# EAGLE board sp0256_dcf77 (EAGLE 7.7.0)
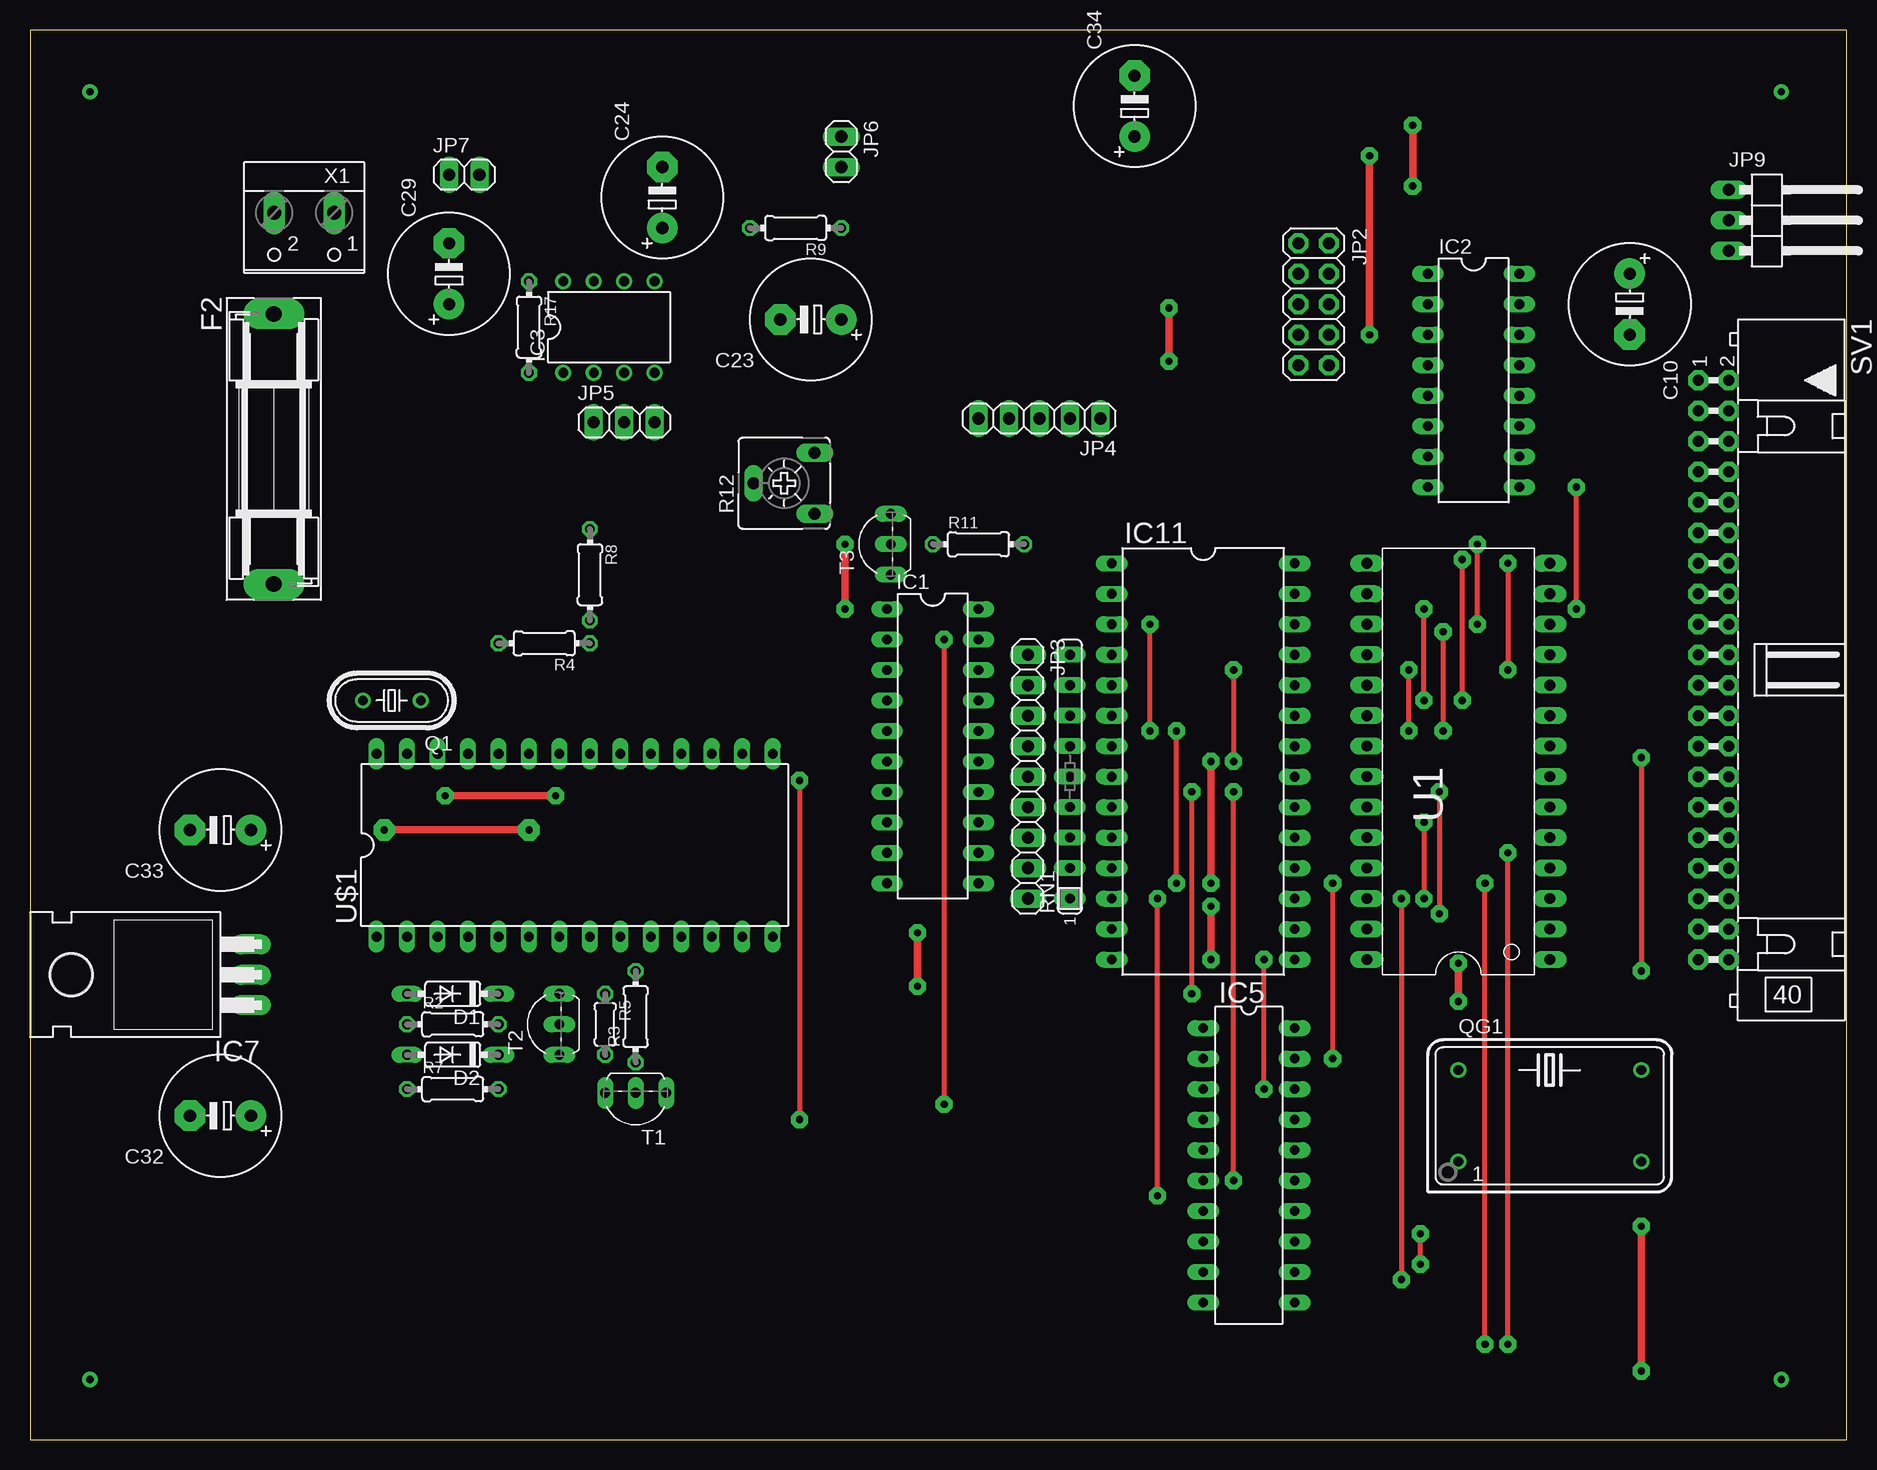
[diagram p0: board, top side]
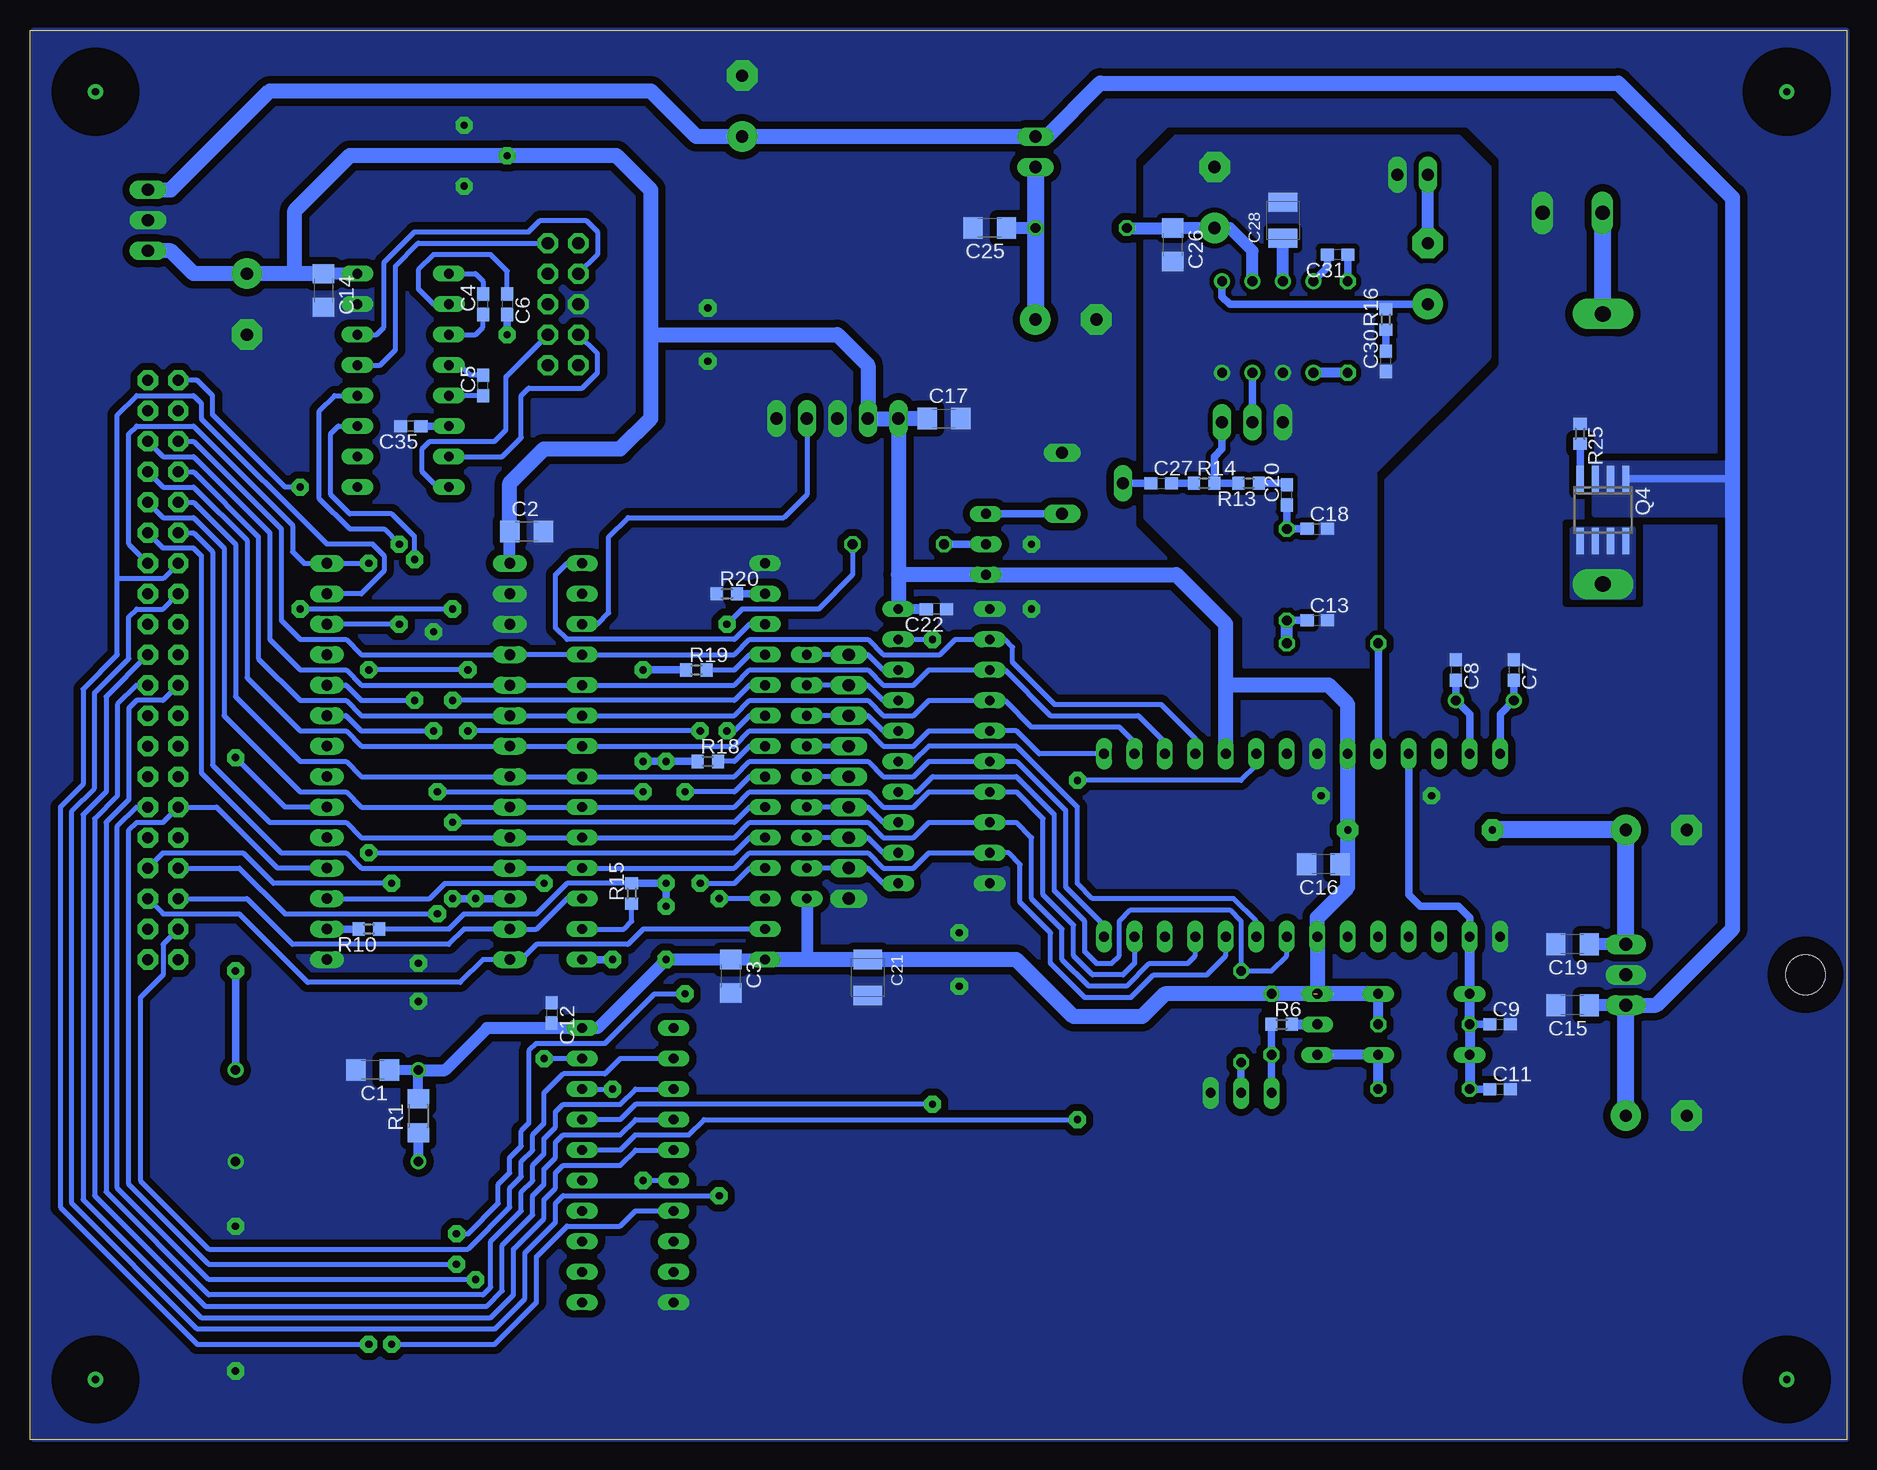
[diagram p1: board, bottom side, seen from below]

Size 151.44 x 117.47 mm. Coordinates in mm from the lower left corner, seen from the top.
Outline: 0,0 151.44,0 151.44,117.47 0,117.47 0,0
Copper layers (1*16): Top 0.035mm / dielectric 1.5mm / Bottom 0.035mm
Design rules "default *": minimum track width 10mil, minimum drill 24mil, track to track 8mil, track to pad 8mil, pad to pad 8mil, via to via 8mil, smd to smd 8mil, copper to edge 0mil, drill to drill 8mil, minimum pad ring 10mil, minimum via ring 8mil, stop-mask expansion 4mil, vias tented up to drill 0mil, thermal gap 10mil
bRestrict: area 2,2 to 8,8; area 2,109.3 to 8,115.4; area 142.9,2 to 149,8; area 142.9,109.3 to 149,115.4; area 116.2,57.8 to 128.9,61

## Footprints (pad centres in the part's own frame; a part is rotated, then mirrored left to right if it is on the bottom)
C1206 = smd 1.6 x 1.8: 1 -1.4,0; 2 1.4,0
C0603 = smd 1.1 x 1: 1 -0.85,0; 2 0.85,0
E5-10,5 = drill 1.016 pad 2.54: + -2.54,0 | drill 1.016 pad 2.54 octagon: - 2.54,0
SMC_B = smd 1.6 x 2.4: + -1.5,0; - 1.5,0
DO35-7 = drill 0.813 long: A 3.81,0; C -3.81,0
SH22,5 = drill 1.321 pad 2.54 long: 1 -11.252,0; 2 11.252,0
DIL20 = drill 0.813 long: 1 -11.43,-3.81; 2 -8.89,-3.81; 3 -6.35,-3.81; 4 -3.81,-3.81; 5 -1.27,-3.81; 6 1.27,-3.81; 7 3.81,-3.81; 8 6.35,-3.81; 9 8.89,-3.81; 10 11.43,-3.81; 11 11.43,3.81; 12 8.89,3.81; 13 6.35,3.81; 14 3.81,3.81; 15 1.27,3.81; 16 -1.27,3.81; 17 -3.81,3.81; 18 -6.35,3.81; 19 -8.89,3.81; 20 -11.43,3.81
DIL16 = drill 0.813 long: 1 -8.89,-3.81; 2 -6.35,-3.81; 3 -3.81,-3.81; 4 -1.27,-3.81; 5 1.27,-3.81; 6 3.81,-3.81; 7 6.35,-3.81; 8 8.89,-3.81; 9 8.89,3.81; 10 6.35,3.81; 11 3.81,3.81; 12 1.27,3.81; 13 -1.27,3.81; 14 -3.81,3.81; 15 -6.35,3.81; 16 -8.89,3.81
DIL08 = drill 0.813 pad 1.27: 1 -3.81,-3.81; 2 -1.27,-3.81; 3 1.27,-3.81; 4 3.81,-3.81; 5 3.81,3.81; 6 1.27,3.81; 7 -1.27,3.81; 8 -3.81,3.81
TO220H = drill 1.118 long: 1 -2.54,-10.16; 2 0,-10.16; 3 2.54,-10.16 | hole 3.302: 0,4.826
DIL28 = drill 0.813 long: 1 -16.51,-7.62; 2 -13.97,-7.62; 3 -11.43,-7.62; 4 -8.89,-7.62; 5 -6.35,-7.62; 6 -3.81,-7.62; 7 -1.27,-7.62; 8 1.27,-7.62; 9 3.81,-7.62; 10 6.35,-7.62; 11 8.89,-7.62; 12 11.43,-7.62; 13 13.97,-7.62; 14 16.51,-7.62; 15 16.51,7.62; 16 13.97,7.62; 17 11.43,7.62; 18 8.89,7.62; 19 6.35,7.62; 20 3.81,7.62; 21 1.27,7.62; 22 -1.27,7.62; 23 -3.81,7.62; 24 -6.35,7.62; 25 -8.89,7.62; 26 -11.43,7.62; 27 -13.97,7.62; 28 -16.51,7.62
2X05 = drill 1.016 pad 1.676 octagon: 1 -5.08,-1.27; 2 -5.08,1.27; 3 -2.54,-1.27; 4 -2.54,1.27; 5 0,-1.27; 6 0,1.27; 7 2.54,-1.27; 8 2.54,1.27; 9 5.08,-1.27; 10 5.08,1.27
1X09 = drill 1.016 long: 1 -10.16,0; 2 -7.62,0; 3 -5.08,0; 4 -2.54,0; 5 0,0; 6 2.54,0; 7 5.08,0; 8 7.62,0; 9 10.16,0
1X05 = drill 1.016 long: 1 -5.08,0; 2 -2.54,0; 3 0,0; 4 2.54,0; 5 5.08,0
1X03 = drill 1.016 long: 1 -2.54,0; 2 0,0; 3 2.54,0
1X02 = drill 1.016 long: 1 -1.27,0; 2 1.27,0
1X03/90 = drill 1.016 long: 1 -2.54,-3.81; 2 0,-3.81; 3 2.54,-3.81
HC49U-V = drill 0.813: 1 -2.413,0; 2 2.413,0
SO-08 = smd 0.6 x 2.2: 1 -1.905,-2.6; 2 -0.635,-2.6; 3 0.635,-2.6; 4 1.905,-2.6; 5 1.905,2.6; 6 0.635,2.6; 7 -0.635,2.6; 8 -1.905,2.6
DIL14S = drill 0.813: 1 -7.62,-3.81; 7 7.62,-3.81; 8 7.62,3.81; 14 -7.62,3.81
R1206 = smd 1.6 x 1.803: 1 -1.422,0; 2 1.422,0
0204/7 = drill 0.813 octagon: 1 -3.81,0; 2 3.81,0
0204/5 = drill 0.813 octagon: 1 -2.54,0; 2 2.54,0
R0603 = smd 1 x 1.1: 1 -0.85,0; 2 0.85,0
CA6V = drill 1.016 long: A -2.54,-2.54; E 2.54,-2.54; S 0,2.54
SIL9 = drill 0.813 long: 1 -10.16,0; 2 -7.62,0; 3 -5.08,0; 4 -2.54,0; 5 0,0; 6 2.54,0; 7 5.08,0; 8 7.62,0; 9 10.16,0
ML40L = drill 0.914 pad 1.676 octagon: 1 -24.13,-1.27; 2 -24.13,1.27; 3 -21.59,-1.27; 4 -21.59,1.27; 5 -19.05,-1.27; 6 -19.05,1.27; 7 -16.51,-1.27; 8 -16.51,1.27; 9 -13.97,-1.27; 10 -13.97,1.27; 11 -11.43,-1.27; 12 -11.43,1.27; 13 -8.89,-1.27; 14 -8.89,1.27; 15 -6.35,-1.27; 16 -6.35,1.27; 17 -3.81,-1.27; 18 -3.81,1.27; 19 -1.27,-1.27; 20 -1.27,1.27; 21 1.27,-1.27; 22 1.27,1.27; 23 3.81,-1.27; 24 3.81,1.27; 25 6.35,-1.27; 26 6.35,1.27; 27 8.89,-1.27; 28 8.89,1.27; 29 11.43,-1.27; 30 11.43,1.27; 31 13.97,-1.27; 32 13.97,1.27; 33 16.51,-1.27; 34 16.51,1.27; 35 19.05,-1.27; 36 19.05,1.27; 37 21.59,-1.27; 38 21.59,1.27; 39 24.13,-1.27; 40 24.13,1.27
TO92-CBE = drill 0.813 long: B 0,0; C -2.54,0; E 2.54,0
DIP-28 = drill 0.889 long: 1 -15.24,-7.62; 2 -12.7,-7.62; 3 -10.16,-7.62; 4 -7.62,-7.62; 5 -5.08,-7.62; 6 -2.54,-7.62; 7 0,-7.62; 8 2.54,-7.62; 9 5.08,-7.62; 10 7.62,-7.62; 11 10.16,-7.62; 12 12.7,-7.62; 13 15.24,-7.62; 14 17.78,-7.62; 15 17.78,7.62; 16 15.24,7.62; 17 12.7,7.62; 18 10.16,7.62; 19 7.62,7.62; 20 5.08,7.62; 21 2.54,7.62; 22 0,7.62; 23 -2.54,7.62; 24 -5.08,7.62; 25 -7.62,7.62; 26 -10.16,7.62; 27 -12.7,7.62; 28 -15.24,7.62
W237-102 = drill 1.194 long: 1 -2.5,-1.27; 2 2.5,-1.27

## Placement (x,y rotation side)
C1  [C1206]  122.87,30.8 180 bottom
C2  [C1206]  110.04,75.68 0 bottom
C3  [C1206]  93.03,38.61 270 bottom
C4  [C0603]  113.67,94.61 90 bottom
C5  [C0603]  113.67,87.85 90 bottom
C6  [C0603]  111.66,94.61 270 bottom
C7  [C0603]  27.75,64.14 270 bottom
C8  [C0603]  32.58,64.14 270 bottom
C9  [C0603]  28.89,34.61 0 bottom
C10  [E5-10,5]  133.35,94.61 270 top
C11  [C0603]  28.89,29.21 0 bottom
C12  [C0603]  107.95,35.56 270 bottom
C13  [C0603]  44.13,68.26 0 bottom
C14  [C1206]  126.97,95.76 270 bottom
C15  [C1206]  22.86,36.2 180 bottom
C16  [C1206]  43.62,47.94 180 bottom
C17  [C1206]  75.25,85.09 0 bottom
C18  [C0603]  44.13,75.88 0 bottom
C19  [C1206]  22.86,41.27 180 bottom
C20  [C0603]  46.67,78.73 90 bottom
C21  [SMC_B]  81.6,38.51 270 bottom
C22  [C0603]  75.88,69.22 180 bottom
C23  [E5-10,5]  65.09,93.34 180 top
C24  [E5-10,5]  52.7,103.5 90 top
C25  [C1206]  71.44,100.97 180 bottom
C26  [C1206]  56.2,99.57 270 bottom
C27  [C0603]  57.15,79.69 0 bottom
C28  [SMC_B]  46.99,101.6 90 bottom
C29  [E5-10,5]  34.92,97.16 90 top
C30  [C0603]  38.42,89.85 90 bottom
C31  [C0603]  42.44,98.74 180 bottom
C32  [E5-10,5]  15.88,26.99 180 top
C33  [E5-10,5]  15.88,50.8 180 top
C34  [E5-10,5]  92.08,111.12 90 top
C35  [C0603]  119.7,84.45 180 bottom
D1  1N4148DO35-7  [DO35-7]  35.24,37.15 180 top
D2  1N4148DO35-7  [DO35-7]  35.24,32.07 180 top
F2  [SH22,5]  20.32,82.55 270 top
IC1  74245N  [DIL20]  75.25,57.78 270 top
IC2  MAX232  [DIL16]  120.33,88.27 270 top
IC3  LM386N-1  [DIL08]  48.26,92.71 0 top
IC5  ATF16V8BP3  [DIL20]  101.6,22.86 270 top
IC7  7805T  [TO220H]  8.26,38.73 90 top
IC11  [DIL28]  97.79,56.52 270 top
JP2  [2X05]  107,94.61 270 top
JP3  [1X09]  83.19,55.24 270 top
JP4  [1X05]  84.14,85.09 180 top
JP5  [1X03]  49.53,84.77 0 top
JP6  [1X02]  67.63,107.31 270 top
JP7  [1X02]  36.2,105.41 0 top
JP9  [1X03/90]  145.41,101.6 270 top
Q1  [HC49U-V]  30.16,61.59 180 top
Q4  [SO-08]  20.32,77.47 180 bottom
QG1  [DIL14S]  126.68,26.99 0 top
R1  [R1206]  119.06,26.99 90 bottom
R2  100k  [0204/7]  35.24,34.61 0 top
R3  10k  [0204/7]  50.48,35.24 90 top
R4  33k  [0204/7]  42.86,66.36 180 top
R5  1k  [0204/5]  47.94,34.61 270 top
R6  200k  [R0603]  47.09,34.61 0 bottom
R7  100k  [0204/7]  35.24,29.21 0 top
R8  33k  [0204/7]  46.67,72.07 270 top
R9  [0204/7]  63.82,100.97 180 top
R10  [R0603]  123.19,42.55 180 bottom
R11  [0204/7]  79.06,74.61 0 top
R12  [CA6V]  62.87,79.69 90 top
R13  10k  [R0603]  49.85,79.69 180 bottom
R14  10k  [R0603]  53.56,79.69 0 bottom
R15  [R0603]  101.28,45.5 90 bottom
R16  [R0603]  38.42,93.34 90 bottom
R17  [0204/7]  41.59,92.71 270 top
R18  [R0603]  94.93,56.52 0 bottom
R19  [R0603]  95.89,64.14 0 bottom
R20  [R0603]  93.34,70.48 0 bottom
R25  1k  [R0603]  22.23,83.82 270 bottom
RN1  [SIL9]  86.68,55.24 90 top
SV1  [ML40L]  140.34,64.14 270 top
T1  [TO92-CBE]  50.48,28.89 180 top
T2  [TO92-CBE]  44.13,34.61 90 top
T3  [TO92-CBE]  71.75,74.61 90 top
U1  [DIP-28]  119.06,55.24 90 top
U$1  SPO256-AL2  [DIL28]  45.4,49.53 0 top
X1  [W237-102]  22.86,100.97 180 top

## Library data of the parts
C1-C35 R1-R11 R13-R20 R25 = rcl
D1 D2 = diode
F2 = fuse; MF: SCHURTER; MPN: 0031.8201; OC_FARNELL: 1162740; OC_NEWARK: 96F8317
IC1 = 74xx-us
IC2 = maxim; MF: MAXIM; MPN: MAX232ACPE+; OC_FARNELL: 9723773; OC_NEWARK: 68K4544
IC3 IC7 = linear
IC5 = atmel; MPN: ATF16V8CZ-15PU; OC_FARNELL: 1551768; OC_NEWARK: 94M6254
IC11 = micro-motorola; OC_FARNELL: unknown; OC_NEWARK: unknown
JP2-JP7 JP9 = pinhead
Q1 = crystal; OC_FARNELL: 1666969; OC_NEWARK: unknown
Q4 = transistor-power
QG1 = crystal; OC_FARNELL: unknown; OC_NEWARK: unknown
R12 = pot
RN1 = resistor-sil; OC_FARNELL: unknown; OC_NEWARK: unknown
SV1 = con-harting-ml; OC_FARNELL: unknown; OC_NEWARK: unknown
T1-T3 = transistor
U1 = 65xxx
U$1 = mw
X1 = con-wago-500; MPN: 237-102; OC_FARNELL: unknown; OC_NEWARK: 70K9898

## Nets
9V: C15.1 C32.+ C34.+ IC7.1 JP6.1 JP9.1 Q4.1 Q4.2 Q4.3
9V_SW: C23.+ C25.1 JP6.2 R9.1
A0: IC11.10 SV1.13 U1.13
A1: IC11.11 SV1.14 U1.14
A2: IC11.12 SV1.15
A3: SV1.16
A4: SV1.17
A5: SV1.18
A6: SV1.19
A7: IC5.5 SV1.20
A8: IC5.3 SV1.21
A9: IC5.4 SV1.22
A10: SV1.23
A11: SV1.24
A12: SV1.25
A13: SV1.26
A14: SV1.27
A15: SV1.28
AGND: C13.2 C18.2 C24.- C26.2 C28.- C30.1 IC3.2 IC3.4 JP5.1 JP7.2
AUDIO_AMP_IN: JP5.3 R13.2 R14.2
AVCC: C24.+ C26.1 IC3.6 R9.2
CS_0: IC5.2 SV1.37
CS_1: SV1.38
CS_2: SV1.39
CS_3: SV1.40
CS_4: SV1.32
D0: IC1.2 IC11.25 SV1.5 U1.18 U$1.18
D1: IC1.3 IC11.24 SV1.6 U1.19 U$1.17
D2: IC1.4 IC11.23 SV1.7 U1.20 U$1.16
D3: IC1.5 IC11.22 SV1.8 U1.21 U$1.15
D4: IC1.6 IC11.21 SV1.9 U1.22 U$1.14
D5: IC1.7 IC11.20 SV1.10 U1.23 U$1.13
D6: IC1.8 IC11.19 SV1.11 U1.24 U$1.11
D7: IC1.9 IC11.18 SV1.12 U1.25 U$1.10
DCF77_PULSE_IN: IC11.26 JP4.2
DIGITAL_OUT: R4.2 U$1.24
FI2: IC11.17 SV1.35 U1.27
GATE2: IC11.2 R20.2
GND: C1.2 C2.2 C3.2 C7.1 C8.1 C9.2 C10.- C11.2 C12.1 C14.2 C15.2 C16.2 C17.2 C19.2 C21.- C22.1 C23.- C25.2 C32.- C33.- C34.- C35.2 IC1.1 IC1.10 IC2.15 IC5.10 IC7.2 IC11.1 JP2.5 JP3.9 JP4.1 JP4.3 JP9.2 QG1.7 R12.E R20.1 R25.1 T1.C U1.1 U1.9 U1.16 U1.17 U$1.1 U$1.22 X1.1
INPORT_CS: IC1.19 IC5.17
IRQ: IC11.9 SV1.30 U1.26
LRQ: IC1.15 U$1.9
N$1: Q4.4 R25.2
N$3: IC11.3 IC11.28
N$4: C35.1 IC2.6
N$5: QG1.1 R1.1
N$6: C7.2 Q1.2 U$1.28
N$7: C8.2 Q1.1 U$1.27
N$8: R3.1 T1.B
N$9: C4.2 IC2.1
N$10: C5.2 IC2.4
N$11: C5.1 IC2.5
N$12: C4.1 IC2.3
N$13: C6.1 IC2.2
N$15: IC1.18 JP3.1 RN1.9
N$16: IC1.17 JP3.2 RN1.8
N$17: IC1.16 JP3.3 RN1.7
N$18: C13.1 R4.1 R8.2
N$19: JP3.5 RN1.5
N$20: IC1.13 JP3.6 RN1.4
N$21: IC1.12 JP3.7 RN1.3
N$22: IC1.11 JP3.8 RN1.2
N$26: JP3.4 RN1.6
N$27: R10.2 U1.2
N$28: R5.2 R6.1 T1.E
N$29: R6.2 T2.B
N$30: D2.C R7.2 T2.C
N$31: IC11.16 R15.1
N$32: C18.1 C20.1 R8.1
N$33: C28.+ IC3.7
N$34: IC11.7 R18.2
N$35: IC11.6 R11.2
N$36: R11.1 T3.B
N$38: R12.A T3.E
N$39: C27.1 R12.S
N$40: C27.2 R14.1
N$41: C20.2 R13.1
N$42: IC3.3 JP5.2
N$43: C29.+ IC3.5 R16.2
N$45: C30.2 R16.1
N$46: IC3.1 R17.2
N$47: C31.1 R17.1
N$48: C31.2 IC3.8
N$49: C29.- JP7.1
N$50: IC11.4 R19.2
N$52: F2.2 Q4.5 Q4.6 Q4.7 Q4.8
N$53: F2.1 X1.2
NMI: SV1.31
OUT_1: IC11.5 SV1.1
OUT_2: SV1.2
OUT_3: SV1.3
OUT_4: SV1.4
RD: IC5.6 SV1.33
RS_CTS: IC2.8 JP2.8
RS_RTS: IC2.7 JP2.7
RS_RXD: IC2.13 JP2.2
RS_TXD: IC2.14 JP2.3
RST: IC11.8 SV1.29 U1.4
RW: IC11.13 SV1.36 U1.28
RXD_TTL: IC2.12 U1.12
SBY: IC1.14 R3.2 U$1.8
SP0256_CS: IC5.16 U$1.20
SPO_RESET: C9.1 C11.1 D1.A D2.A R2.1 R7.1 U$1.2 U$1.25
TIMER_CS: IC5.18 IC11.15
TXD_TTL: IC2.11 U1.10
UART_CLK: QG1.8 U1.6
UART_CS: IC5.19 U1.3
VCC: C1.1 C2.1 C3.1 C6.2 C10.+ C12.2 C14.1 C16.1 C17.1 C19.1 C21.+ C22.2 C33.+ D1.C IC1.20 IC2.16 IC5.20 IC7.3 IC11.14 JP4.4 JP4.5 JP9.3 QG1.14 R1.2 R2.2 R5.1 R10.1 R15.2 R18.1 R19.1 RN1.1 T2.E T3.C U1.15 U$1.7 U$1.19 U$1.23
WR: IC5.7 SV1.34

## Tracks (layer width: path | path; a pad name or v marks a point on that pad's centre or on a via)
9V
  Bottom 0.61: Q4.1 9.53,80.07 9.53,80.01
  Bottom 1.016: IC7.1 C15.1
  Bottom 1.27: JP9.1 139.7,104.14 131.44,112.39 99.69,112.39 95.89,108.58 C34.+ JP6.1 66.67,108.58 62.23,113.03 19.05,113.03 9.53,103.5 9.53,80.01 9.53,42.55 15.88,36.2 IC7.1
  Bottom 1.422: C32.+ IC7.1
  pour Bottom (isolate 0.406, no thermals): 9.53,77.15 20.95,77.15 20.95,81.28 9.53,81.28
9V_SW
  Bottom 1.016: R9.1 C25.1
  Bottom 1.422: JP6.2 R9.1 C23.+
A0  (via drill 0.6 pad 1.42)
  Top 0.406: v123.19,7.94 v123.19,48.9
  Bottom 0.406: SV1.13 140.34,71.75 144.15,71.75 | 144.15,71.75 144.15,65.41 147,62.55 147,54.61 148.91,52.7 148.91,19.37 137.48,7.94 v123.19,7.94 | 144.15,71.75 144.15,85.41 142.56,87 137.79,87 137.16,86.36 137.16,85.09 126.68,74.61 122.87,74.61 121.92,73.66 121.92,72.39 123.83,70.48 U1.13 | IC11.10 91.44,50.16 92.71,48.9 v123.19,48.9
A1  (via drill 0.6 pad 1.42)
  Top 0.406: v123.19,73.03 v123.19,64.14 | v95.57,46.35 v95.57,59.05 | v114.94,59.05 v114.94,64.14
  Bottom 0.406: v123.19,73.03 U1.14 128.59,73.03 129.54,73.98 129.54,76.2 137.79,84.45 142.56,84.45 143.19,83.82 143.19,74.61 SV1.14 | v95.57,46.35 92.71,46.35 91.44,47.62 IC11.11 | v95.57,59.05 v114.94,59.05 | v114.94,64.14 v123.19,64.14
A2  (via drill 0.6 pad 1.42)
  Top 0.406: v93.98,20.32 v93.98,45.09
  Bottom 0.406: SV1.15 140.34,69.22 142.56,69.22 143.19,68.58 143.19,65.09 146.05,62.23 146.05,54.29 147.96,52.39 147.96,19.68 137.48,9.21 112.71,9.21 110.17,11.75 110.17,15.56 107.63,18.1 107.63,19.68 107,20.32 v93.98,20.32 | IC11.12 v93.98,45.09
A7
  Bottom 0.406: SV1.20 145.1,61.91 145.1,53.98 147,52.07 147,20 137.16,10.16 113.03,10.16 111.12,12.06 111.12,15.88 108.58,18.41 108.58,20 107.63,20.95 107.63,22.23 107,22.86 102.23,22.86 100.97,24.13 IC5.5
A8
  Bottom 0.406: SV1.21 140.34,61.59 142.56,61.59 143.19,60.96 143.19,53.34 145.1,51.44 145.1,20.64 136.53,12.06 113.67,12.06 113.03,12.7 113.03,16.51 110.49,19.05 110.49,20.64 109.54,21.59 109.54,22.86 108.58,23.81 108.58,25.08 107.63,26.04 107.63,27.3 107,27.94 102.23,27.94 100.97,29.21 IC5.3
A9
  Bottom 0.406: SV1.22 142.56,62.87 144.15,61.28 144.15,53.66 146.05,51.75 146.05,20.32 136.84,11.11 113.35,11.11 112.08,12.38 112.08,16.19 109.54,18.73 109.54,20.32 108.58,21.27 108.58,22.54 107.63,23.5 107.63,24.77 107,25.4 102.23,25.4 100.97,26.67 IC5.4
AGND
  pour Bottom (isolate 0.406, no thermals): 55.88,108.58 32.38,108.58 29.84,106.05 29.84,90.17 39.37,80.64 39.37,64.45 50.16,64.45 50.16,68.58 58.42,76.83 58.42,106.05
AUDIO_AMP_IN
  Bottom 0.61: JP5.3 52.07,82.55 52.71,81.91 R14.2 R13.2
AVCC
  Bottom 0.61: C26.1 56.52,100.97
  Bottom 1.016: R9.2 56.52,100.97 | C26.1 C24.+ 51.44,100.97 49.53,99.06 IC3.6
CS_0
  Bottom 0.406: SV1.37 140.34,41.27 140.34,38.73 142.24,36.83 142.24,21.59 136.53,15.88 114.94,15.88 111.44,19.37 111.44,20.95 110.49,21.91 110.49,23.18 109.54,24.13 109.54,25.4 108.58,26.35 108.58,28.89 107,30.48 103.5,30.48 102.23,31.75 IC5.2
D0
  Bottom 0.406: SV1.5 137.79,83.19 130.49,75.88 130.49,68.26 128.91,66.67 125.09,66.67 123.83,65.41 U1.18 IC11.25 92.71,65.41 91.44,66.67 81.6,66.67 80.33,65.41 75.56,65.41 74.3,66.67 IC1.2 70.17,66.67 69.53,66.04 69.53,64.77 66.04,61.28 57.15,61.28 54.29,58.42 U$1.18 54.29,57.47
D1
  Bottom 0.406: SV1.6 140.34,81.92 137.79,81.92 131.44,75.56 131.44,66.67 128.91,64.14 125.09,64.14 123.83,62.87 U1.19 IC11.24 92.71,62.87 91.44,64.14 81.6,64.14 80.33,62.87 77.79,62.87 76.52,64.14 IC1.3 70.17,64.14 66.36,60.33 59.05,60.33 56.83,58.1 U$1.17
D2
  Bottom 0.406: SV1.7 137.79,80.64 132.4,75.25 132.4,65.09 128.91,61.59 125.09,61.59 123.83,60.33 U1.20 IC11.23 92.71,60.33 91.44,61.59 81.6,61.59 80.33,60.33 77.79,60.33 76.52,61.59 IC1.4 70.17,61.59 67.94,59.37 60.64,59.37 59.37,58.1 U$1.16
D3
  Bottom 0.406: SV1.8 140.34,79.38 137.79,79.38 133.35,74.93 133.35,63.5 128.91,59.05 125.09,59.05 123.83,57.78 U1.21 IC11.22 92.71,57.78 91.44,59.05 81.6,59.05 80.33,57.78 77.79,57.78 76.52,59.05 IC1.5 69.22,59.05 67.31,57.15 U$1.15
D4
  Bottom 0.406: SV1.9 137.79,78.11 134.3,74.61 134.3,61.91 128.91,56.52 125.09,56.52 123.83,55.24 U1.22 IC11.21 92.71,55.24 91.44,56.52 81.6,56.52 80.33,55.24 77.79,55.24 76.52,56.52 IC1.6 69.22,56.52 65.09,52.39 65.09,46.04 61.91,42.86 U$1.14
D5
  Bottom 0.406: SV1.10 140.34,76.83 137.79,76.83 135.25,74.3 135.25,60.33 128.91,53.98 125.09,53.98 123.83,52.7 U1.23 IC11.20 92.71,52.7 91.44,53.98 81.6,53.98 80.33,52.7 77.79,52.7 76.52,53.98 IC1.7 69.22,53.98 66.99,51.75 66.99,45.4 64.45,42.86 64.45,40.32 62.87,38.73 60.33,38.73 59.37,39.69 U$1.13
D6
  Bottom 0.406: SV1.11 137.79,75.56 136.21,73.98 136.21,56.2 131.44,51.44 125.09,51.44 123.83,50.16 U1.24 IC11.19 92.71,50.16 91.44,51.44 81.6,51.44 80.33,50.16 77.79,50.16 76.52,51.44 IC1.8 69.22,51.44 67.94,50.16 67.94,45.09 65.41,42.55 65.41,40.01 63.18,37.78 60.01,37.78 58.1,39.69 54.93,39.69 54.29,40.32 U$1.11
D7
  Bottom 0.406: SV1.12 140.34,74.3 137.79,74.3 137.16,73.66 137.16,55.56 130.49,48.9 125.09,48.9 123.83,47.62 U1.25 IC11.18 92.71,47.62 91.44,48.9 81.6,48.9 80.33,47.62 77.79,47.62 76.52,48.9 IC1.9 69.85,48.9 68.9,47.94 68.9,44.77 66.36,42.23 66.36,39.69 63.5,36.83 59.69,36.83 57.78,38.73 53.34,38.73 51.75,40.32 U$1.10
DCF77_PULSE_IN
  Bottom 0.406: IC11.26 104.14,67.94 103.19,68.9 103.19,75.25 101.6,76.83 88.58,76.83 86.68,78.74 JP4.2
DIGITAL_OUT
  Bottom 0.61: U$1.24 R4.2
FI2
  Bottom 0.406: SV1.35 133.35,45.09 129.54,41.27 116.52,41.27 115.25,42.55 U1.27 109.22,42.55 106.68,45.09 IC11.17
GATE2
  Bottom 0.61: IC11.2 R20.2
GND  (via drill 0.6 pad 1.42)
  Top 0.406: v117.79,59.05 v117.79,67.31
  Top 0.61: v134.3,5.71 v134.3,17.78 | v119.06,39.69 v119.06,36.51 | v73.98,37.78 v73.98,42.23 | v43.81,53.66 v34.61,53.66 | v67.94,69.22 v67.94,74.61 | v94.93,89.85 v94.93,94.3 | v115.25,104.46 v115.25,109.54
  Bottom 0.406: U1.9 125.09,60.33 123.83,59.05 v117.79,59.05
  pour Bottom (isolate 0.61, rank 2, no thermals): 0,117.47 0,0 151.13,0 151.13,117.47
INPORT_CS  (via drill 0.6 pad 1.42)
  Top 0.406: v76.2,66.67 v76.2,27.94
  Bottom 0.406: IC1.19 v76.2,66.67 | v76.2,27.94 100.97,27.94 102.23,26.67 IC5.17
IRQ  (via drill 0.6 pad 1.42)
  Top 0.406: v114.3,45.09 v114.3,13.34 | v116.2,51.44 v116.2,45.09
  Bottom 0.406: SV1.30 142.56,52.7 144.15,51.12 144.15,20.95 136.53,13.34 v114.3,13.34 | IC11.9 91.44,52.7 92.71,51.44 v116.2,51.44
  Bottom 0.61: U1.26 v114.3,45.09 v116.2,45.09
LRQ
  Bottom 0.406: IC1.15 77.79,56.52 76.52,57.78 69.22,57.78 64.14,52.7 64.14,46.35 62.87,45.09 51.12,45.09 49.21,43.18 U$1.9
N$1
  Bottom 0.61: Q4.4 R25.2
N$3
  Bottom 0.406: IC11.3 91.44,67.94 92.71,66.67 106.68,66.67 107.63,67.63 107.63,72.07 106.68,73.03 IC11.28
N$4
  Bottom 0.61: IC2.6 C35.1
N$5
  Bottom 0.813: R1.1 QG1.1
N$6
  Bottom 0.61: U$1.28 28.89,60.45 Q1.2 C7.2
N$7
  Bottom 0.61: U$1.27 31.43,60.45 Q1.1 C8.2
N$8
  Bottom 0.61: T1.B R3.1
N$9
  Bottom 0.406: IC2.1 114.3,97.16 113.67,96.52 C4.2
N$10
  Bottom 0.406: C5.2 114.73,88.7 115.57,89.53 IC2.4
N$11
  Bottom 0.406: IC2.5 C5.1
N$12
  Bottom 0.406: IC2.3 114.3,92.08 113.67,92.71 C4.1
N$13
  Bottom 0.406: IC2.2 117.79,94.61 119.06,95.89 119.06,97.47 117.79,98.74 113.03,98.74 111.66,97.37 C6.1
N$15
  Bottom 0.406: IC1.18 80.33,64.14 81.6,65.41 JP3.1 RN1.9
N$16
  Bottom 0.406: IC1.17 80.33,61.59 81.6,62.87 JP3.2 RN1.8
N$17
  Bottom 0.406: IC1.16 80.33,59.05 81.6,60.33 JP3.3 RN1.7
N$18
  Bottom 0.61: C13.1 R8.2
  Bottom 1.016: R4.1 R8.2
N$19
  Bottom 0.406: JP3.5 RN1.5
N$20
  Bottom 0.406: IC1.13 80.33,51.44 81.6,52.7 JP3.6 RN1.4
N$21
  Bottom 0.406: IC1.12 80.33,48.9 81.6,50.16 JP3.7 RN1.3
N$22
  Bottom 0.406: IC1.11 80.33,46.35 81.6,47.62 JP3.8 RN1.2
N$23  (via drill 0.6 pad 1.27)
  other vias: 5,112.31
N$24  (via drill 0.6 pad 1.27)
  other vias: 145.97,5
N$25  (via drill 0.6 pad 1.27)
  other vias: 145.97,112.31
N$26
  Bottom 0.406: JP3.4 RN1.6
N$27
  Bottom 0.61: U1.2 R10.2
N$28
  Bottom 0.61: T1.E R5.2 R6.1
N$29
  Bottom 0.813: R6.2 T2.B
N$30
  Bottom 0.813: R7.2 D2.C T2.C
N$31
  Bottom 0.406: IC11.16 101.92,42.55 101.28,43.18 R15.1
N$32
  Bottom 0.61: C18.1 R8.1 C20.1
N$33
  Bottom 1.016: IC3.7 C28.+
N$34
  Bottom 0.406: IC11.7 91.44,57.78 92.71,56.52 R18.2
N$35  (via drill 0.6 pad 1.42)
  Top 0.406: v93.34,59.05 v93.34,67.94
  Bottom 0.406: IC11.6 91.44,60.33 92.71,59.05 v93.34,59.05 | R11.2 82.87,72.07 85.72,69.22 92.08,69.22 v93.34,67.94
N$36
  Bottom 0.61: R11.1 T3.B
N$37  (via drill 0.6 pad 1.27)
  other vias: 5,5
N$38
  Bottom 0.61: R12.A T3.E
N$39
  Bottom 0.61: R12.S C27.1
N$40
  Bottom 0.61: C27.2 R14.1
N$41
  Bottom 0.61: R13.1 46.78,79.69 C20.2
N$42
  Bottom 0.61: JP5.2 IC3.3
N$43
  Bottom 0.61: IC3.5 52.07,95.25 51.44,94.61 38.42,94.61 | 38.42,94.61 C29.+ | R16.2 38.42,94.61
N$45
  Bottom 0.61: C30.2 R16.1
N$46
  Bottom 0.813: R17.2 IC3.1
N$47
  Bottom 0.61: C31.1 R17.1
N$48
  Bottom 0.61: C31.2 43.29,97.68 IC3.8
N$49
  Bottom 1.016: C29.- JP7.1
N$50
  Bottom 0.406: R19.2 92.71,64.14 91.44,65.41 IC11.4
N$52
  pour Bottom (isolate 0.406, no thermals): 17.78,75.88 17.78,70.17 22.86,70.17 22.86,75.88
N$53
  Bottom 1.422: X1.2 20.36,93.84 F2.1
OUT_1  (via drill 0.6 pad 1.42)
  Top 0.406: v116.2,61.59 v116.2,69.22 | v128.91,69.22 v128.91,79.38
  Bottom 0.406: IC11.5 91.44,62.87 92.71,61.59 v116.2,61.59 | v116.2,69.22 v128.91,69.22 | v128.91,79.38 130.18,79.38 136.21,85.41 136.21,87 137.48,88.27 SV1.1
RD  (via drill 0.6 pad 1.42)
  Top 0.406: v117.47,53.98 v117.47,43.81 | v100.33,21.59 v100.33,53.98
  Bottom 0.406: SV1.33 133.99,47.62 130.18,43.81 v117.47,43.81 | v117.47,53.98 v100.33,53.98 | IC5.6 v100.33,21.59
RS_CTS
  Bottom 0.406: IC2.8 117.47,79.38 118.75,80.64 118.75,82.55 118.11,83.19 112.71,83.19 111.76,84.14 111.76,88.58 JP2.8
RS_RTS
  Bottom 0.406: IC2.7 112.08,81.92 110.49,83.5 110.49,87 109.86,87.63 105.41,87.63 104.14,88.9 104.14,90.49 JP2.7
RS_RXD
  Bottom 0.406: IC2.13 122.24,89.53 120.97,90.81 120.97,97.79 119.06,99.69 JP2.2
RS_TXD
  Bottom 0.406: IC2.14 122.56,92.08 121.92,92.71 121.92,98.11 119.38,100.65 109.86,100.65 108.9,101.6 105.09,101.6 104.14,100.65 104.14,98.74 JP2.3
RST  (via drill 0.6 pad 1.42)
  Top 0.406: v115.89,14.61 v115.89,17.14 | v96.84,37.15 v96.84,53.98
  Bottom 0.406: U1.4 130.81,47.62 135.89,52.7 SV1.29 140.34,51.44 142.56,51.44 143.19,50.8 143.19,21.27 136.53,14.61 v115.89,14.61 | IC11.8 91.44,55.24 92.71,53.98 v96.84,53.98 | v115.89,17.14 114.94,17.14 112.39,19.68 112.39,21.27 111.44,22.23 111.44,23.5 110.49,24.45 110.49,25.72 109.86,26.35 109.86,32.38 109.22,33.02 103.5,33.02 99.38,37.15 v96.84,37.15
RW
  Bottom 0.406: SV1.36 140.34,43.81 133.99,43.81 128.27,38.1 115.57,38.1 113.67,40.01 U1.28 110.49,40.01 109.22,41.27 101.6,41.27 100.33,42.55 IC11.13
RXD_TTL  (via drill 0.6 pad 1.42)
  Top 0.406: v120.65,67.94 v120.65,74.61
  Bottom 0.406: v120.65,67.94 U1.12 | IC2.12 126.05,87 127.32,85.72 127.32,78.42 124.78,75.88 121.92,75.88 v120.65,74.61
SBY
  Bottom 0.406: IC1.14 77.47,53.98 76.2,55.24 69.22,55.24 66.04,52.07 66.04,45.72 63.5,43.18 63.5,40.64 62.55,39.69 61.28,39.69 60.64,40.32 60.64,43.18 59.69,44.13 51.44,44.13 50.48,43.18 R3.2 47.94,39.05 46.67,40.32 U$1.8
SP0256_CS  (via drill 0.6 pad 1.42)
  Top 0.406: v64.14,54.93 v64.14,26.67
  Bottom 0.406: U$1.20 49.21,56.2 50.48,54.93 v64.14,54.93 | IC5.16 102.23,24.13 100.97,25.4 96.52,25.4 95.25,26.67 v64.14,26.67
SPO_RESET
  Bottom 0.61: U$1.2 31.43,42.55 31.43,43.5 32.38,44.45 35.56,44.45 36.51,45.4 U$1.25 | C9.1 R2.1 | C11.1 R7.1
  Bottom 0.813: 31.43,42.55 D1.A R2.1 D2.A R7.1
TIMER_CS  (via drill 0.6 pad 1.42)
  Top 0.406: v102.87,29.21 v102.87,40.01
  Bottom 0.406: IC5.18 v102.87,29.21
  Bottom 0.61: v102.87,40.01 IC11.15
TXD_TTL  (via drill 0.6 pad 1.42)
  Top 0.406: v119.38,61.59 v119.38,73.34
  Bottom 0.406: U1.10 125.09,62.87 123.83,61.59 v119.38,61.59 | IC2.11 125.73,84.45 126.36,83.82 126.36,78.74 124.78,77.15 121.28,77.15 119.38,75.25 v119.38,73.34
UART_CLK  (via drill 0.6 pad 1.42)
  Top 0.406: v134.3,56.83 v134.3,39.05
  Bottom 0.406: U1.6 130.18,52.7 v134.3,56.83
  Bottom 0.61: v134.3,39.05 QG1.8
UART_CS  (via drill 0.6 pad 1.42)
  Top 0.406: v108.58,31.75 v108.58,46.35
  Bottom 0.406: U1.3 118.11,45.09 116.84,46.35 v108.58,46.35 | IC5.19 v108.58,31.75
VCC  (via drill 0.6 pad 1.42, 0.6 pad 1.78)  (1 unrouted)
  Top 0.406: v100.33,64.14 v100.33,56.52
  Top 0.61: v98.42,44.45 v98.42,40.01 | v98.42,46.35 v98.42,56.52 | v29.53,50.8 v41.59,50.8 | v111.66,107 v111.66,92.08
  Bottom 0.406: R10.1 116.52,42.55 115.25,43.81 109.22,43.81 106.68,46.35 100.97,46.35 100.96,46.35 R15.2
  Bottom 0.61: C14.1 | C3.1 92.71,40.01 | 111.09,34.25 111.12,34.29 | 100.97,46.35 v98.42,46.35 v98.42,44.45 | C2.1 111.44,76.2 | R18.1 v98.42,56.52 v100.33,56.52 | C21.+ 81.28,40.01 | v100.33,64.14 R19.1 | v111.66,92.08 C6.2
  Bottom 0.813: R1.2 QG1.14 C1.1 | R2.2 D1.C | C22.2 IC1.20
  Bottom 1.016: IC2.16 C14.1 | U1.15 111.44,76.2 | QG1.14 116.84,30.8 113.35,34.29 111.12,34.29 107.95,34.29 | IC11.14 92.71,40.01 v98.42,40.01 104.14,34.29 IC5.20 107.95,34.29 | RN1.1 86.68,40.01 | 107.95,34.29 C12.2 | IC7.3 C19.1
  Bottom 1.27: 129.35,97.16 129.35,102.42 124.78,107 111.76,107 v111.66,107 102.55,107 99.69,104.14 99.69,92.08 | C14.1 129.35,97.16 | IC11.14 86.68,40.01 81.28,40.01 69.22,40.01 64.45,35.24 58.74,35.24 56.83,37.15 R5.1 44.45,37.15 | 99.69,92.08 99.69,85.09 102.23,82.55 108.58,82.55 111.44,79.7 C2.1 | 99.69,92.08 84.14,92.08 81.6,89.53 JP4.4 JP4.5 | U$1.19 51.75,62.87 | 51.75,62.87 43.18,62.87 41.59,61.28 U$1.23 v41.59,50.8 41.59,48.26 | D1.C 44.45,37.15 | 44.45,37.15 44.13,37.47 U$1.7 44.13,43.5 41.59,46.04 41.59,48.26 | 51.75,62.87 51.75,67.94 55.88,72.07 T3.C 79.06,72.07 | 129.35,97.16 C10.+ 137.79,97.16 139.7,99.06 JP9.3 | C17.1 JP4.5 | C16.1 41.91,47.94 41.59,48.26 | JP4.5 79.06,72.07 | 79.06,72.07 IC1.20
  Bottom 1.422: IC7.3 C33.+ v29.53,50.8
WR  (via drill 0.6 pad 1.42)
  Top 0.406: v121.28,7.94 v121.28,46.35
  Bottom 0.406: SV1.34 140.34,48.9 133.67,48.9 131.13,46.35 v121.28,46.35 | v121.28,7.94 112.71,7.94 109.22,11.43 109.22,15.24 106.68,17.78 102.23,17.78 100.97,19.05 IC5.7